# EAGLE board sensor garis v2 (EAGLE 7.1.0)
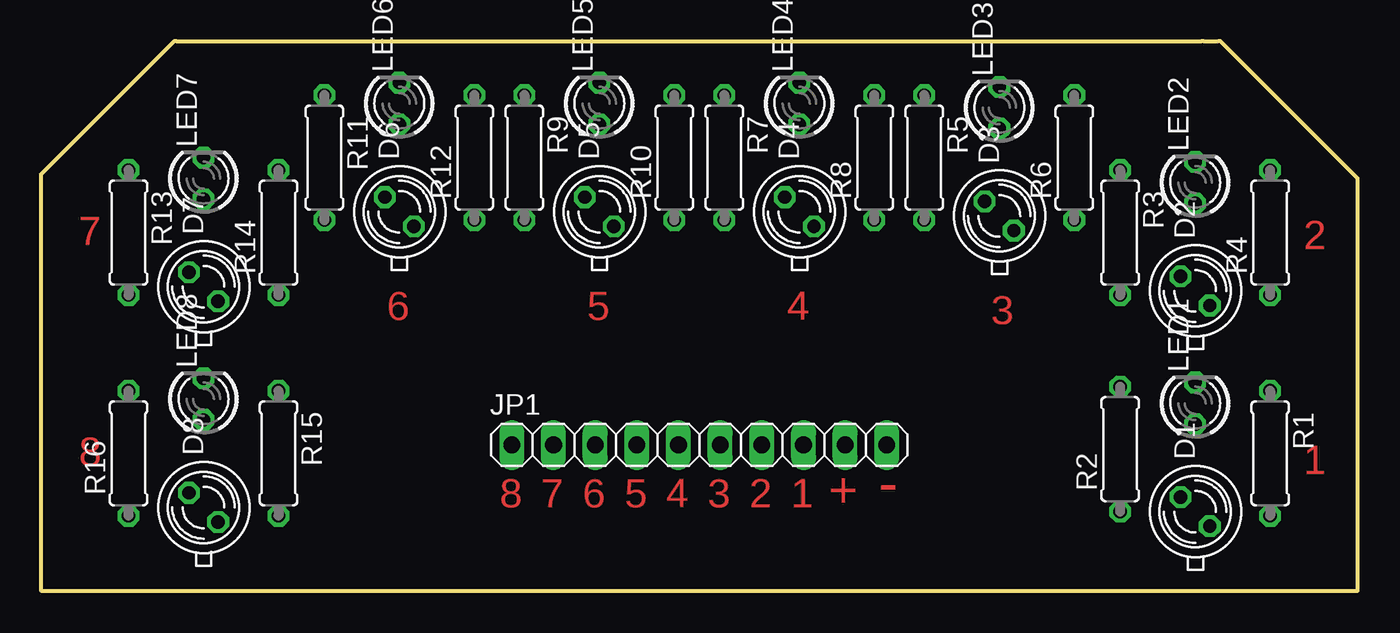
[diagram p0: board, top side]
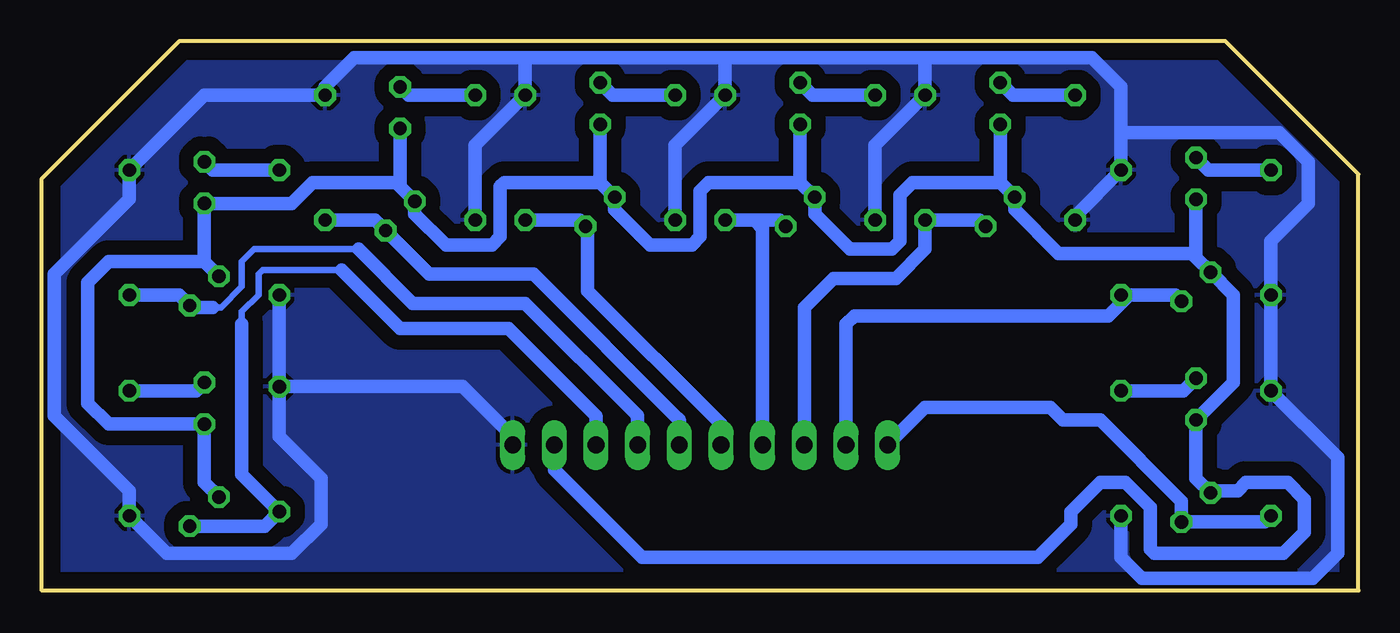
[diagram p1: board, bottom side, seen from below]

Size 80.26 x 33.53 mm. Coordinates in mm from the lower left corner, seen from the top.
Outline: 8.23,33.53 70.76,33.53
Outline: 70.87,33.53 71.78,33.53
Outline: 71.88,33.53 80.26,25.15 80.26,0 0,0 0,25.4 8.13,33.53
Copper layers (1*16): Top 0.035mm / dielectric 1.5mm / Bottom 0.035mm
Design rules "default *": minimum track width 10mil, minimum drill 24mil, track to track 35mil, track to pad 35mil, pad to pad 8mil, via to via 8mil, smd to smd 8mil, copper to edge 40mil, drill to drill 8mil, minimum pad ring 10mil, minimum via ring 8mil, stop-mask expansion 4mil, vias tented up to drill 0mil, thermal gap 10mil

## Footprints (pad centres in the part's own frame; a part is rotated, then mirrored left to right if it is on the bottom)
BPX65 = drill 0.813 octagon: A -0.889,-0.889; K 0.889,0.889
1X10 = drill 1.016 long: 1 -11.43,0; 2 -8.89,0; 3 -6.35,0; 4 -3.81,0; 5 -1.27,0; 6 1.27,0; 7 3.81,0; 8 6.35,0; 9 8.89,0; 10 11.43,0
LED3MM = drill 0.813 octagon: A -1.27,0; K 1.27,0
0207/7 = drill 0.813 octagon: 1 -3.81,0; 2 3.81,0

## Placement (x,y rotation side)
D1  [BPX65]  70.36,4.83 90 top
D2  [BPX65]  70.36,18.29 90 top
D3  [BPX65]  58.42,22.86 90 top
D4  [BPX65]  46.23,23.11 90 top
D5  [BPX65]  34.04,23.11 90 top
D6  [BPX65]  21.84,23.11 90 top
D7  [BPX65]  9.91,18.54 90 top
D8  [BPX65]  9.91,5.08 90 top
JP1  [1X10]  40.13,8.89 0 top
LED1  [LED3MM]  70.36,11.43 90 top
LED2  [LED3MM]  70.36,24.89 90 top
LED3  [LED3MM]  58.42,29.46 90 top
LED4  [LED3MM]  46.23,29.72 90 top
LED5  [LED3MM]  34.04,29.72 90 top
LED6  [LED3MM]  21.84,29.72 90 top
LED7  [LED3MM]  9.91,25.15 90 top
LED8  [LED3MM]  9.91,11.68 90 top
R1  330  [0207/7]  74.93,8.38 270 top
R2  22K  [0207/7]  65.79,8.64 90 top
R3  330  [0207/7]  65.79,21.84 270 top
R4  22K  [0207/7]  74.93,21.84 90 top
R5  330  [0207/7]  53.85,26.42 270 top
R6  22K  [0207/7]  62.99,26.42 90 top
R7  330  [0207/7]  41.66,26.42 270 top
R8  22K  [0207/7]  50.8,26.42 90 top
R9  330  [0207/7]  29.46,26.42 270 top
R10  22K  [0207/7]  38.61,26.42 90 top
R11  330  [0207/7]  17.27,26.42 270 top
R12  22K  [0207/7]  26.42,26.42 90 top
R13  330  [0207/7]  5.33,21.84 270 top
R14  22K  [0207/7]  14.48,21.84 90 top
R15  330  [0207/7]  14.48,8.38 270 top
R16  22K  [0207/7]  5.33,8.38 90 top

## Library data of the parts
D1-D8 = opto-trans-siemens; MPN: BPX65.; OC_FARNELL: 327451; OC_NEWARK: 06WX2764
JP1 = pinhead
LED1-LED8 = led
R1-R16 = rcl

## Nets
5V: D1.K D2.K D3.K D4.K D5.K D6.K D7.K D8.K JP1.9 LED1.A LED2.A LED3.A LED4.A LED5.A LED6.A LED7.A LED8.A
GND: JP1.10 R1.2 R2.2 R3.2 R4.2 R5.2 R6.2 R7.2 R8.2 R9.2 R10.2 R11.2 R12.2 R13.2 R14.2 R15.2 R16.2
N$1: LED2.K R3.1
N$2: LED1.K R1.1
N$3: LED3.K R5.1
N$4: LED4.K R7.1
N$5: LED5.K R9.1
N$6: LED6.K R11.1
N$7: LED7.K R13.1
N$8: LED8.K R15.1
P1: D1.A JP1.8 R2.1
P2: D2.A JP1.7 R4.1
P3: D3.A JP1.6 R6.1
P4: D4.A JP1.5 R8.1
P5: D5.A JP1.4 R10.1
P6: D6.A JP1.3 R12.1
P7: D7.A JP1.2 R14.1
P8: D8.A JP1.1 R16.1

## Tracks (layer width: path | path; a pad name or v marks a point on that pad's centre or on a via)
5V
  Bottom 0.813: LED6.A 21.84,24.89 | 21.84,24.89 D6.K 20.95,23.24 18.29,20.57 9.91,20.57 | 21.84,24.89 27.18,24.89 27.94,24.13 27.94,21.34 28.45,20.83 30.99,20.83 33.15,22.99 D5.K 34.04,24.89 | LED5.A 34.04,24.89 | 34.04,24.89 39.62,24.89 40.13,24.38 40.13,21.59 40.64,21.08 43.18,21.08 45.34,23.24 D4.K 46.23,24.89 | LED4.A 46.23,24.89 | 46.23,24.89 52.07,24.89 52.32,24.64 52.32,21.59 52.83,21.08 55.63,21.08 57.53,22.99 D3.K 58.42,24.64 58.42,24.89 | LED3.A 58.42,24.89 | LED7.A 9.91,20.57 | 9.91,20.57 9.91,20.32 D7.K 7.62,18.03 7.62,12.7 LED8.A 9.91,6.86 D8.K 8.89,6.1 7.37,6.1 6.86,6.6 4.32,6.6 3.3,5.59 3.3,3.56 4.57,2.29 12.45,2.29 12.7,2.54 12.7,5.08 14.22,6.6 15.75,6.6 17.53,4.83 17.53,4.06 19.56,2.03 43.69,2.03 49.02,7.37 JP1.9 | 70.36,20.07 LED2.A 65.02,23.62 63.75,24.89 58.42,24.89 | 70.36,20.07 D2.K | D1.K 70.36,6.6 LED1.A 76.2,10.16 77.47,11.43 77.47,18.8 76.2,20.07 70.36,20.07
GND
  Bottom 0.813: 50.8,32.51 61.21,32.51 62.99,30.73 R6.2 70.36,30.23 R4.2 74.93,23.88 79.5,19.3 79.5,10.67 74.93,6.1 R1.2 72.64,2.29 65.02,2.29 63.25,4.06 63.25,6.86 65.79,9.4 R2.2 | 50.8,32.51 38.61,32.51 | 38.61,32.51 26.42,32.51 | 26.42,32.51 16.26,32.51 14.48,30.73 14.48,27.69 | 26.42,32.51 R12.2 29.46,27.18 R9.2 | 38.61,32.51 R10.2 41.66,27.18 R7.2 | 50.8,32.51 R8.2 53.85,27.18 R5.2 | 14.48,27.69 R14.2 17.27,22.86 R11.2 | 14.48,27.69 14.22,27.94 4.83,27.94 3.05,26.16 3.05,23.62 5.33,21.34 R13.2 R16.2 1.27,8.13 1.27,2.29 2.79,0.76 13.21,0.76 14.48,2.03 R15.2 | R2.2 R3.2 | JP1.10 51.56,9.4 54.61,12.45 R2.2
  pour Bottom: 8.13,33.53 71.88,33.53 80.26,25.15 80.26,0 0,0 0,25.4
N$1
  Bottom 0.813: R3.1 69.85,25.65 LED2.K
N$2
  Bottom 0.813: R1.1 70.87,12.19 LED1.K
N$3
  Bottom 0.813: R5.1 57.91,30.23 LED3.K
N$4
  Bottom 0.813: R7.1 45.47,30.23 LED4.K
N$5
  Bottom 0.813: R9.1 33.27,30.23 LED5.K
N$6
  Bottom 0.813: R11.1 21.08,30.23 LED6.K
N$7
  Bottom 0.813: R13.1 9.14,25.65 LED7.K
N$8
  Bottom 0.813: R15.1 10.67,12.19 LED8.K
P1
  Bottom 0.406: 61.98,19.56 66.8,19.56 67.06,19.3 67.06,18.03 68.07,17.02 68.07,16.26
  Bottom 0.813: JP1.8 46.48,10.56 arc-45 46.56,10.74 51.82,16 58.42,16 61.98,19.56 | D1.A 66.68,3.94 R2.1 68.07,7.11 68.07,16.26
P2
  Bottom 0.406: 60.96,20.83 67.31,20.83 68.07,20.07 68.07,18.54 69.34,17.27 69.85,17.27
  Bottom 0.813: JP1.7 43.94,10.56 arc-45 44.02,10.74 50.8,17.53 57.66,17.53 60.96,20.83 | R4.1 71.88,18.03 D2.A 71.12,17.27 69.85,17.27
P3
  Bottom 0.813: R6.1 59.94,22.61 D3.A 56.64,19.3 50.29,19.3 41.48,10.49 arc45 41.4,10.31 JP1.6
P4
  Bottom 0.813: R8.1 47.5,22.61 D4.A 47.06,22.17 arc45 46.99,21.99 46.99,18.29 38.94,10.23 arc45 38.86,10.05 JP1.5
P5
  Bottom 0.813: R10.1 36.83,22.61 | 36.83,22.61 35.31,22.61 D5.A | JP1.4 36.32,22.1 36.83,22.61
P6
  Bottom 0.813: D6.A 23.11,22.61 R12.1 26.42,20.83 28.19,19.05 32,19.05 33.78,17.27 JP1.3
P7
  Bottom 0.813: JP1.2 31.24,16.26 30.73,16.76 15.24,16.76 13.97,18.03 | R14.1 13.97,18.03 | 13.97,18.03 11.18,18.03 D7.A
P8
  Bottom 0.813: R16.1 5.71,4.19 D8.A 10.79,5.46 15.75,10.41 18.03,10.41 18.8,11.18 26.42,11.18 JP1.1

## Text on the board
Top: 7 | 2 | 6 | 5 | 4 | 3 | 8 | 1 | 8 | 7 | 6 | 5 | 4 | 3 | 2 | 1 | + | -